# EAGLE board komparator (EAGLE 7.1.0)
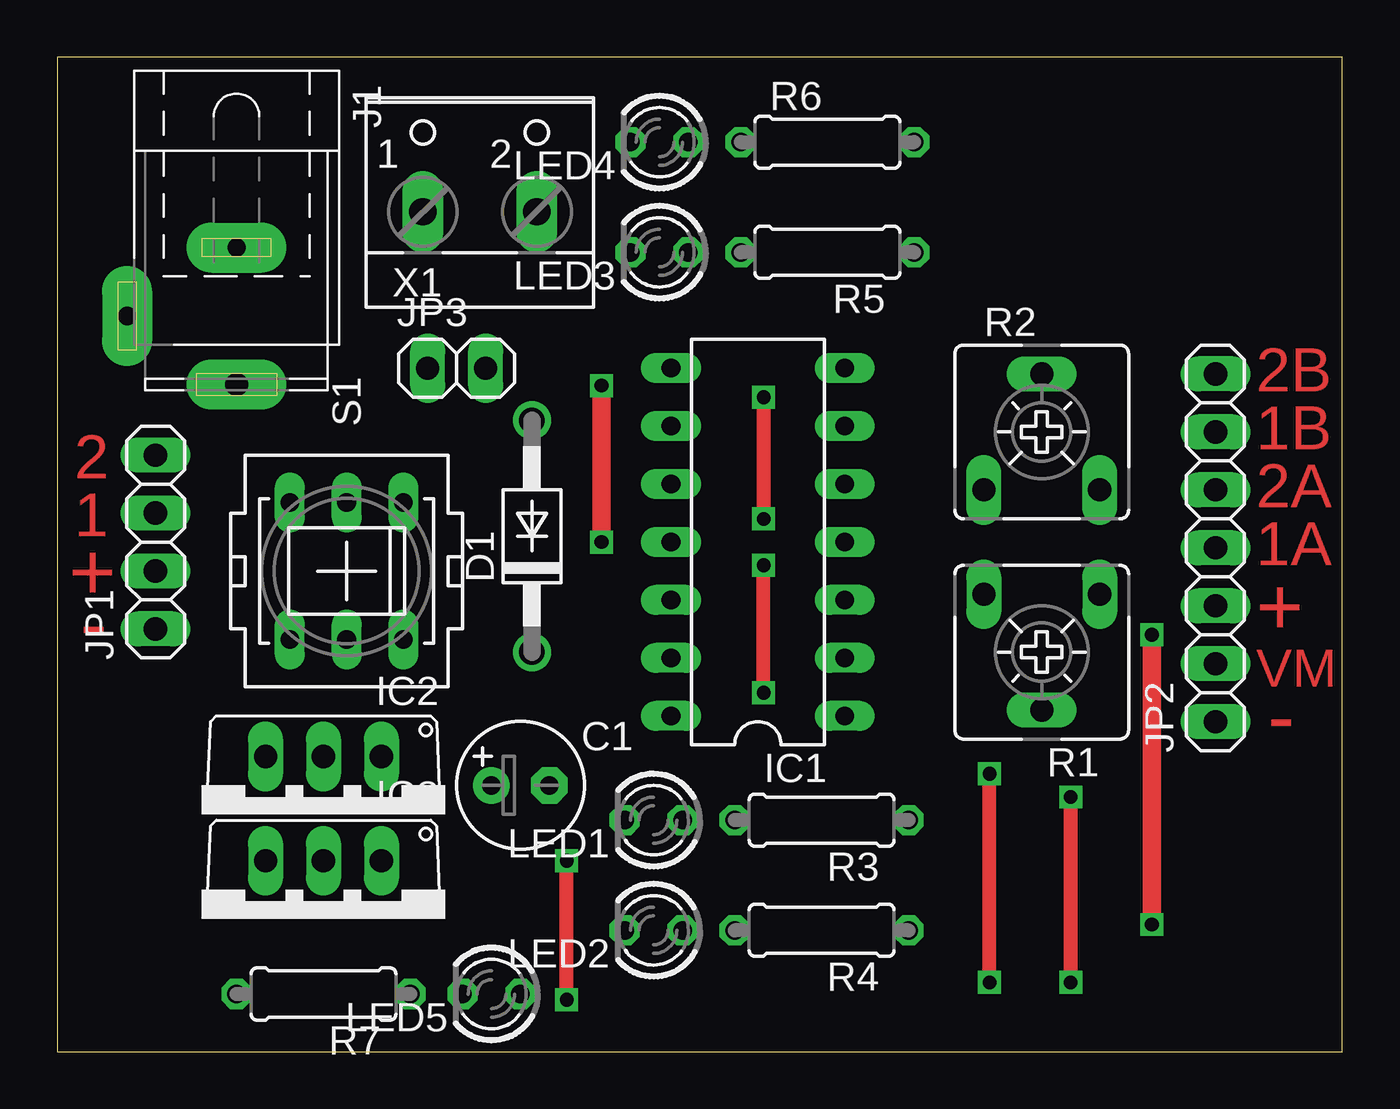
[diagram p0: board, top side]
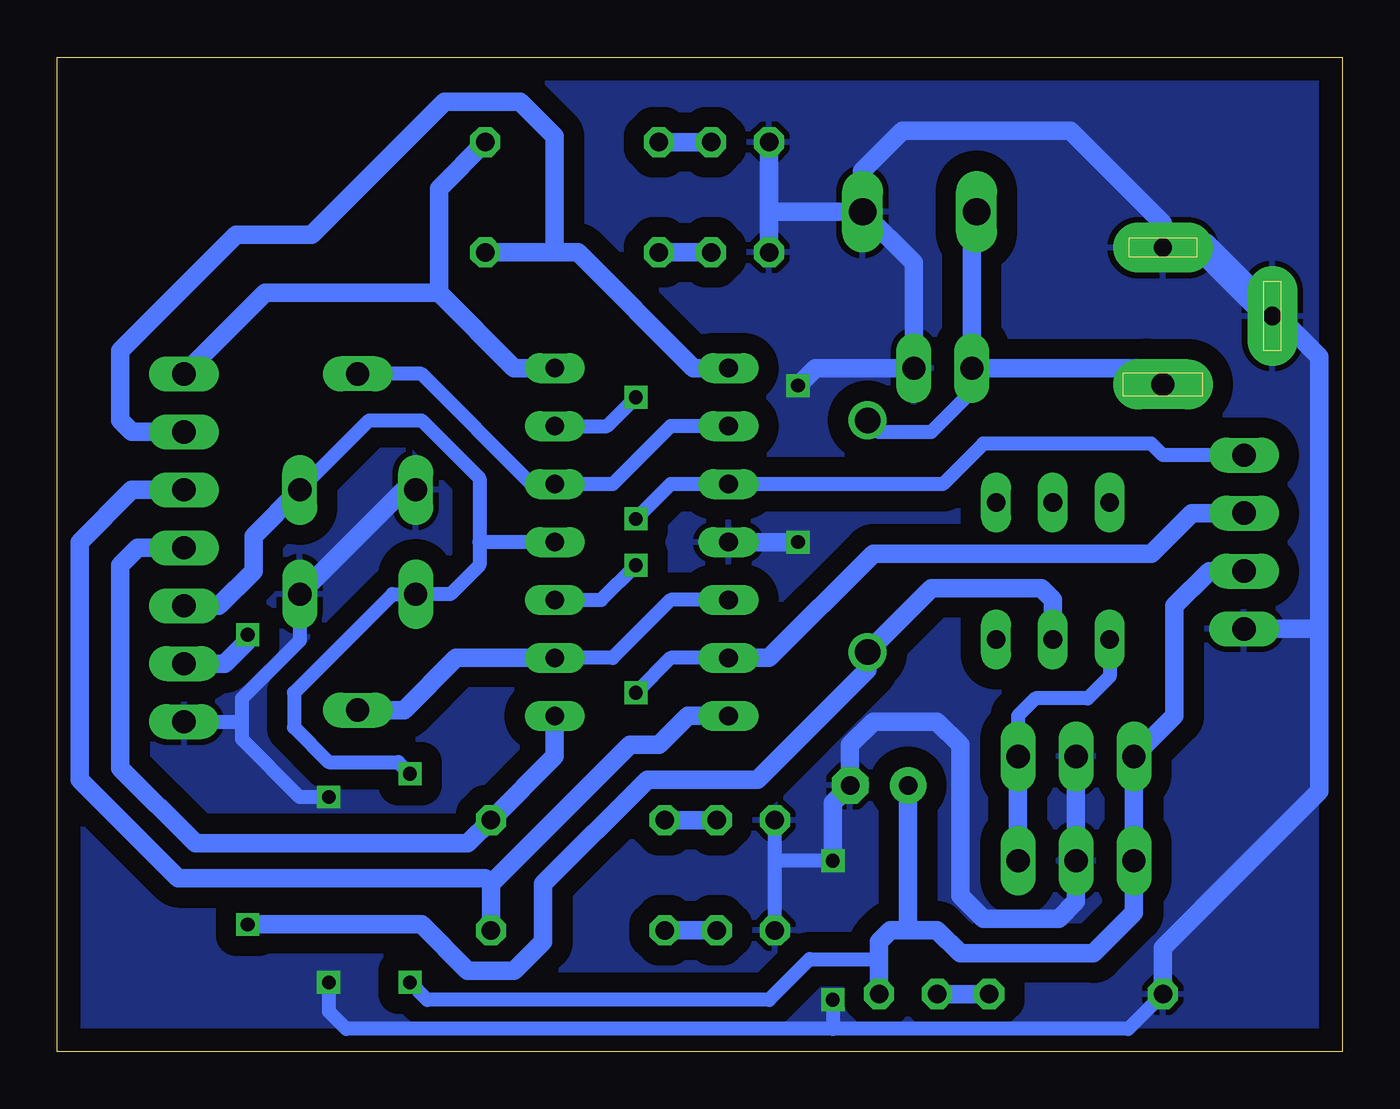
[diagram p1: board, bottom side, seen from below]

Size 56.37 x 43.61 mm. Coordinates in mm from the lower left corner, seen from the top.
Outline: 0,0 56.37,0 56.37,43.61 0,43.61 0,0
Copper layers (1*16): Top 0.035mm / dielectric 1.5mm / Bottom 0.035mm
Design rules "default *": minimum track width 10mil, minimum drill 24mil, track to track 35mil, track to pad 35mil, pad to pad 8mil, via to via 8mil, smd to smd 8mil, copper to edge 40mil, drill to drill 8mil, minimum pad ring 10mil, minimum via ring 8mil, stop-mask expansion 4mil, vias tented up to drill 0mil, thermal gap 10mil

## Footprints (pad centres in the part's own frame; a part is rotated, then mirrored left to right if it is on the bottom)
E2,5-6 = drill 0.813 pad 1.6: + -1.27,0 | drill 0.813 pad 1.6 octagon: - 1.27,0
DO41-10 = drill 1.118: A 5.08,0; C -5.08,0
DIL14 = drill 0.813 long: 1 -7.62,-3.81; 2 -5.08,-3.81; 3 -2.54,-3.81; 4 0,-3.81; 5 2.54,-3.81; 6 5.08,-3.81; 7 7.62,-3.81; 8 7.62,3.81; 9 5.08,3.81; 10 2.54,3.81; 11 0,3.81; 12 -2.54,3.81; 13 -5.08,3.81; 14 -7.62,3.81
TO220V = drill 1.016 long: 1 -2.54,-2.54; 2 0,-2.54; 3 2.54,-2.54
SPC4077 = drill 0.8 pad 2.184 long: 1 -3,0; 2 0,-4.8 | drill 1 pad 2.184 long: 3 3,0
1X04 = drill 1.016 long: 1 -3.81,0; 2 -1.27,0; 3 1.27,0; 4 3.81,0
1X07 = drill 1.016 long: 1 -7.62,0; 2 -5.08,0; 3 -2.54,0; 4 0,0; 5 2.54,0; 6 5.08,0; 7 7.62,0
1X02 = drill 1.016 long: 1 -1.27,0; 2 1.27,0
LED3MM = drill 0.813 octagon: A -1.27,0; K 1.27,0
CA6V = drill 1.016 long: A -2.54,-2.54; E 2.54,-2.54; S 0,2.54
0207/7 = drill 0.813 octagon: 1 -3.81,0; 2 3.81,0
PVA2R = drill 0.813 long: 1 -2.997,2.489; 2 -2.997,0; 3 -2.997,-2.489; 4 2.997,2.489; 5 2.997,0; 6 2.997,-2.489
W237-102 = drill 1.194 long: 1 -2.5,-1.27; 2 2.5,-1.27

## Placement (x,y rotation side)
C1  100uF  [E2,5-6]  20.32,11.68 0 top
D1  1N4004  [DO41-10]  20.83,22.61 90 top
IC1  LM324N  [DIL14]  30.73,22.35 90 top
IC2  7805TV  [TO220V]  11.68,10.41 180 top
IC3  7805TV  [TO220V]  11.68,5.84 180 top
J1  [SPC4077]  7.87,32.26 270 top
JP1  [1X04]  4.32,22.35 90 top
JP2  [1X07]  50.8,22.1 90 top
JP3  [1X02]  17.53,29.97 0 top
LED1  [LED3MM]  26.16,10.16 180 top
LED2  [LED3MM]  26.16,5.33 180 top
LED3  [LED3MM]  26.42,35.05 180 top
LED4  [LED3MM]  26.42,39.88 180 top
LED5  [LED3MM]  19.05,2.54 180 top
R1  [CA6V]  43.18,17.53 180 top
R2  [CA6V]  43.18,27.18 0 top
R3  1K  [0207/7]  33.53,10.16 180 top
R4  1K  [0207/7]  33.53,5.33 180 top
R5  1K  [0207/7]  33.78,35.05 180 top
R6  1K  [0207/7]  33.78,39.88 0 top
R7  330  [0207/7]  11.68,2.54 180 top
S1  [PVA2R]  12.7,21.08 90 top
X1  [W237-102]  18.54,38.1 0 top

## Library data of the parts
C1 R3-R7 = rcl
D1 = diode
IC1-IC3 = linear
J1 = con-jack; OC_FARNELL: unknown; OC_NEWARK: unknown
JP1-JP3 = pinhead
LED1-LED5 = led
R1 R2 = pot
S1 = switch-misc
X1 = con-wago-500; MPN: 237-102; OC_FARNELL: unknown; OC_NEWARK: 70K9898

## Nets
1A: IC1.1 JP2.4 R3.1
1B: IC1.8 JP2.6 R5.1
2A: IC1.14 JP2.5 R4.1
2B: IC1.7 JP2.7 R6.2
5V: C1.+ IC1.4 IC2.3 IC3.3 JP1.2 JP2.3 LED5.A R1.E R2.E
GND: C1.- IC1.11 IC2.2 IC3.2 J1.1 J1.2 JP1.1 JP2.1 JP3.2 LED1.K LED2.K LED3.K LED4.K R1.A R2.A R7.2 X1.2
N$1: IC1.2 IC1.12 R1.S
N$2: IC1.5 IC1.9 R2.S
N$3: IC2.1 IC3.1 S1.1
N$4: LED1.A R3.2
N$6: LED2.A R4.2
N$8: LED3.A R5.2
N$10: LED4.A R6.1
N$11: LED5.K R7.1
P1: IC1.3 IC1.13 JP1.3
P2: IC1.6 IC1.10 JP1.4
VCC: D1.A J1.3 JP3.1 X1.1
VIN: D1.C JP2.2 S1.2

## Tracks (layer width: path | path; a pad name or v marks a point on that pad's centre or on a via)
1A
  Bottom 0.813: IC1.1 34.54,12.95 R3.1 38.35,9.14 50.29,9.14 53.59,12.45 53.59,21.34 52.83,22.1 JP2.4
1B
  Bottom 0.813: IC1.8 28.45,29.97 33.53,35.05 34.29,35.05 | 34.29,35.05 R5.1 | JP2.6 53.09,27.18 53.59,27.69 53.59,30.73 48.51,35.81 45.21,35.81 39.37,41.66 36.07,41.66 34.54,40.13 34.54,35.31 34.29,35.05
2A
  Bottom 0.813: IC1.14 28.7,14.73 29.97,13.46 31.24,13.46 37.34,7.37 | JP2.5 53.09,24.64 55.37,22.35 55.37,11.94 51.05,7.62 37.59,7.62 37.34,7.37 | R4.1 37.34,7.37
2B
  Bottom 0.813: IC1.7 36.32,29.97 39.62,33.27 | 39.62,33.27 39.62,37.85 R6.2 | 39.62,33.27 47.24,33.27 JP2.7
5V  (via drill 0.6)
  Top 0.61: v40.89,3.05 v40.89,12.19
  Bottom 0.61: R2.E 42.67,27.69 40.39,27.69 37.85,25.15 37.85,22.35 | 37.85,22.35 37.85,21.34 39.12,20.07 R1.E 41.66,20.07 45.97,15.75 45.97,14.22 44.45,12.7 41.4,12.7 v40.89,12.19 | IC1.4 37.85,22.35 | 20.32,4.06 23.37,4.06 25.15,2.29 40.13,2.29 v40.89,3.05
  Bottom 0.813: JP1.2 5.84,21.08 7.37,19.56 7.37,14.73 IC2.3 IC3.3 9.14,6.1 10.92,4.32 16.76,4.32 17.78,5.33 18.8,5.33 | JP2.3 49.28,19.56 47.75,21.08 47.75,22.61 R2.E | LED5.A 20.32,4.06 20.32,4.83 19.81,5.33 18.8,5.33 | C1.+ 19.05,5.59 18.8,5.33
GND  (via drill 0.6)
  Top 0.61: v44.45,3.05 v44.45,11.18 | v22.35,2.29 v22.35,8.38
  Top 0.813: v23.88,22.35 v23.88,29.21
  Bottom 0.61: 22.35,1.02 9.4,1.02 R7.2 | 22.35,1.02 43.69,1.02 44.45,1.78 v44.45,3.05 | R1.A 45.72,18.03 48.26,15.49 48.26,14.48 | v22.35,8.38 24.89,8.38 | 24.89,8.38 LED1.K | LED2.K 24.89,8.38 | 48.26,14.48 48.26,13.72 45.72,11.18 v44.45,11.18 | JP2.1 48.26,14.48 | v22.35,2.29 22.35,1.02
  Bottom 0.813: R2.A 41.15,24.64 R1.A | LED4.K 25.15,36.83 | 25.15,36.83 LED3.K | X1.2 25.15,36.83 | J1.1 7.87,36.32 11.94,40.39 19.3,40.39 21.08,38.61 21.08,36.87 X1.2 | J1.2 2.79,32.26 1.02,30.48 1.02,18.54 | 1.02,18.54 1.02,11.43 7.87,4.57 R7.2 | JP1.1 1.02,18.54 | X1.2 18.8,34.58 JP3.2 23.11,29.97 v23.88,29.21 | IC1.11 v23.88,22.35 | IC2.2 IC3.2 11.68,6.6 12.45,5.84 15.75,5.84 16.76,6.86 16.76,13.46 17.78,14.48 20.57,14.48 21.59,13.46 C1.- 22.35,10.92 v22.35,8.38
  Bottom 1.27: J1.1 6.07,35.26 J1.2
  pour Bottom: 0,43.69 56.39,43.69 56.39,0 0,0
N$1
  Bottom 0.61: IC1.12 29.46,19.81 32,17.27 IC1.2
  Bottom 0.813: IC1.2 38.86,17.27 41.15,14.99 R1.S
N$2
  Bottom 0.61: IC1.9 29.46,27.43 32,24.89 IC1.5 35.56,24.89 40.39,29.72 R2.S
N$3
  Bottom 0.61: S1.1 10.21,16.46 11.18,15.49 13.46,15.49 14.22,14.73 IC2.1
  Bottom 0.813: IC3.1 IC2.1
N$4
  Bottom 0.813: LED1.A R3.2
N$6
  Bottom 0.813: R4.2 LED2.A
N$8
  Bottom 0.813: R5.2 LED3.A
N$10
  Bottom 0.813: LED4.A R6.1
N$11
  Bottom 0.813: R7.1 LED5.K
P1  (via drill 0.6)
  Top 0.61: v30.99,15.75 v30.99,21.34
  Bottom 0.61: IC1.3 32.51,19.81 v30.99,21.34 | IC1.13 29.46,17.27 v30.99,15.75
  Bottom 0.813: JP1.3 6.6,23.62 8.38,21.84 20.57,21.84 25.15,17.27 IC1.13
P2  (via drill 0.6)
  Top 0.61: v30.99,28.7 v30.99,23.37
  Bottom 0.61: IC1.6 32.26,27.43 v30.99,28.7 | v30.99,23.37 29.46,24.89 IC1.10 17.53,24.89 15.75,26.67 8.38,26.67 7.87,26.16 JP1.4
VCC
  Bottom 0.61: D1.A 20.32,27.18 18.03,27.18 16.26,28.96 JP3.1
  Bottom 0.813: J1.3 8.59,29.97 JP3.1 16.26,36.62 X1.1
VIN  (via drill 0.6)
  Top 0.813: v48.01,5.59 v48.01,18.29
  Bottom 0.813: v48.01,5.59 40.39,5.59 38.35,3.56 36.32,3.56 35.05,4.83 35.05,7.37 30.48,11.94 25.65,11.94 20.83,16.76 D1.C 18.03,20.32 13.21,20.32 12.7,19.81 S1.2 | v48.01,18.29 48.01,18.03 49.02,17.02 JP2.2

## Text on the board
Top: 2B | 1B | 2 | 2A | 1 | 1A | + | + | - | VM | -